# Altium PCB PulseGenerator.PcbDoc
Units mil, origin at the board's own origin, x right, y up, seen from the top; angles counter-clockwise.
Board outline 705 x 850 mil, 2 copper layers (Top Layer, Bottom Layer); 6 components, 5 nets, 25 pads, 2 vias.
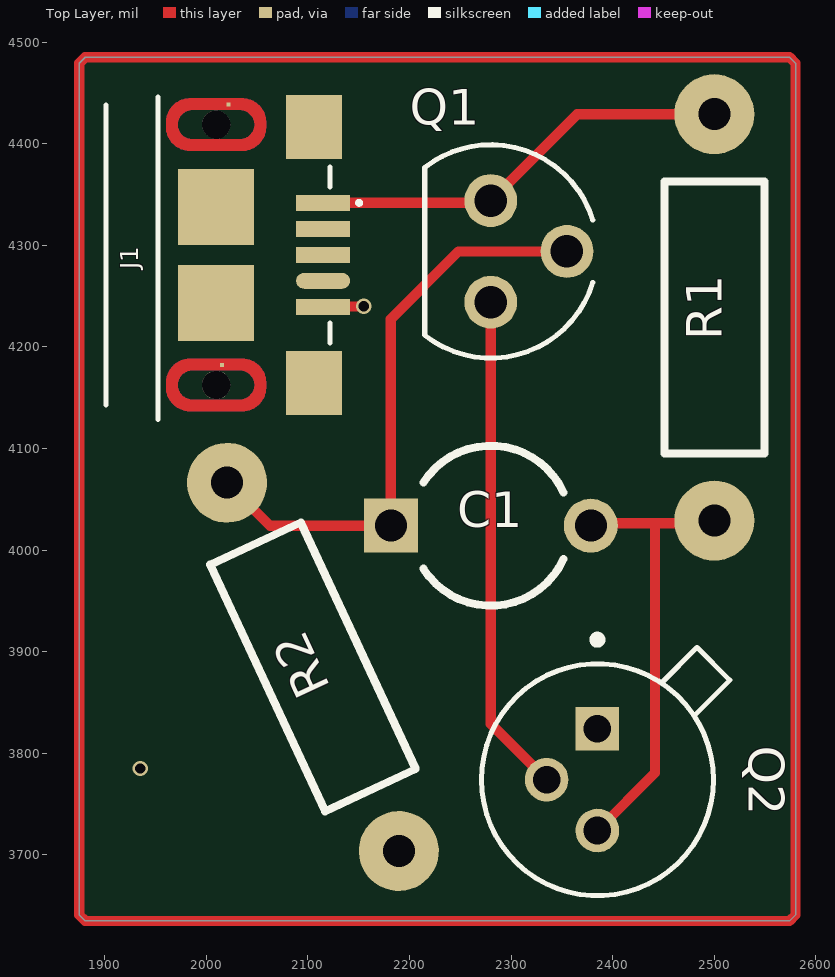
[diagram p0: Top Layer view]
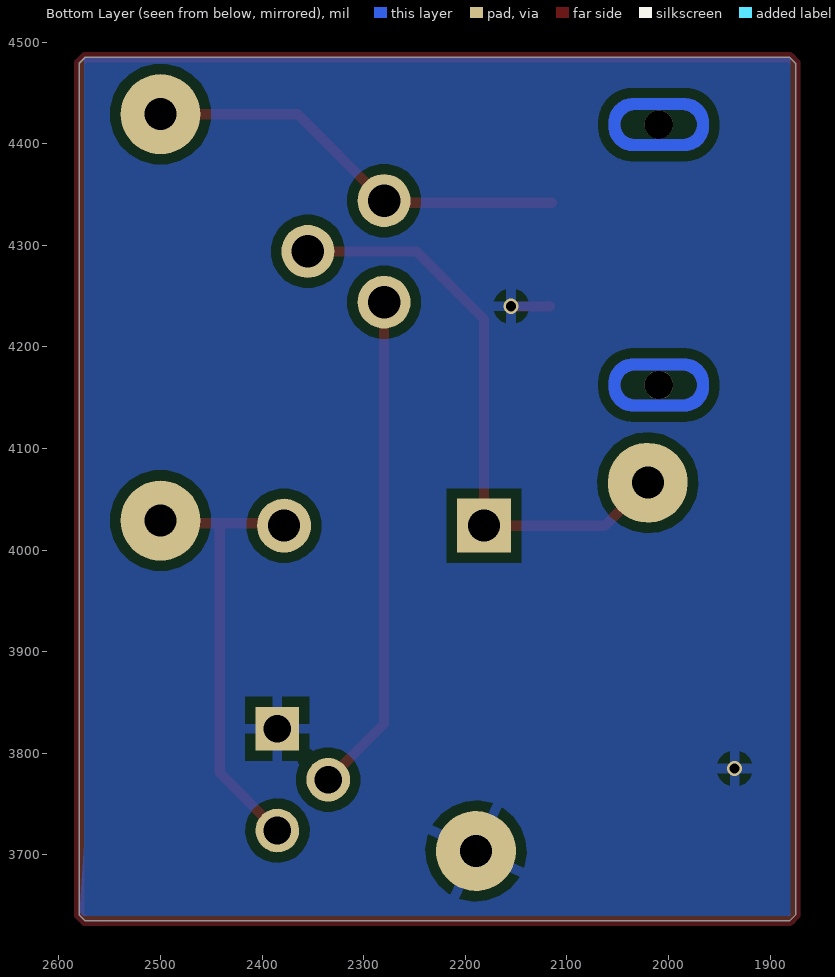
[diagram p1: Bottom Layer view, seen from below]

## Layer stack, top to bottom
Top Solder: solder mask 0.4, Solder Resist, Dk 3.5
Top Layer: signal copper 1.4
Dielectric 1: dielectric 12.6, FR-4, Dk 4.8
Bottom Layer: signal copper 1.4
Bottom Solder: solder mask 0.4, Solder Resist, Dk 3.5

## Board outline
1880.86,3635 1875,3640.86 1875,4479.14 1880.86,4485 2574.14,4485 2580,4479.14 2580,3640.86 2574.14,3635

## Design rules (kind name [scope] priority, off if disabled: settings)
Clearance [All] p1: gap=10 ignorepadtopadclearanceinfootprint=FALSE except(0: Arc-Hole Track-Hole SMDPad-Hole THPad-Hole Via-Hole Fill-Hole Poly-Hole Region-Hole Text-Hole)
PolygonConnect [All] p1: connectstyle=Relief reliefconductorwidth=10 reliefentries=4 polygonreliefangle="90 Angle" airgapwidth=10
RoutingVias [All] p1: holewidth=28 width=50 viastyle="Through Hole" minholewidth=28 minwidth=50 maxholewidth=28 maxwidth=50
SilkToSolderMaskClearance [IsText] p1: minsilkscreentomaskgap=10 clearancetoexposedcopper=TRUE
SolderMaskExpansion [All] p1: expansion=4 istentingtop=FALSE
Width [All] p1: maxlimit=10 minlimit=10 preferedwidth=10
29 further rules are at their usual default settings.

## Components (designator, comment, footprint, x,y, rotation, side; value= is the part's Value field where it differs from the comment)
C1 "Cap2" CAPR5-4X5 2280,4023.94 r0 top value=1uF
J1 "2013499-1" TE_2013499-1 2115,4290.59 r270 top
Q1 "2N3906" TO92 2280,4293.94 r270 top
Q2 "2N2222" TO127P580H530-3 2385,3773.94 r270 top
R1 "22" RES1016-6800X250_PHO 2500,4228.94 r90 top
R2 "100K" RES1016-6800X250_PHO 2105,3885 r115 top

## Footprints (in the part's own frame and the unit in brackets; to place one, negate y for a bottom-side part, rotate by r counter-clockwise, add the part's x,y. Pads: shape width x height; smd on the part's side, far side on the other; paste and mask are expansions set on the pad)
CAPR5-4X5 [mm] "Capacitor; 2 Leads"
  rect 1.35x1.35 hole 0.8: 1(-2.5,0)
  round 1.35 hole 0.8: 2(2.5,0)
  silkscreen extent -1.69,-2 1.82,2
RES1016-6800X250_PHO [mm] "Axial Resistor MCF 6.8D2.5mm"
  round 2 hole 0.8: 1(-5.08,0) 2(5.08,0)
  silkscreen extent -3.4,-1.25 3.4,1.25, body extent -3.45,-1.3 3.45,1.3, height 2.5
TE_2013499-1 [mm]
  rect 0.4x1.35 smd: 1(-1.3,0) 2(-0.65,0) 3(0,0) 5(1.3,0)
  oval 0.4x1.35 smd: 4(0.65,0)
  rect 1.6x1.4 smd: 6(3.2,-0.225) 7(-3.2,-0.225)
  rect 1.9x1.9 smd: 8(-1.2,-2.675) 9(1.2,-2.675)
  rect 0.1x0.1 smd paste-1 mask+0: 10(-3.76,-2.37) 11(2.75,-2.53)
  round 0.71 hole 0.71 unplated: ""(-3.255,-2.675) ""(3.255,-2.675)
  Top Layer region: 126 vertices and 1 holes, not listed, extent -3.91,-3.928 -2.6,-1.425
  Top Layer region: 126 vertices and 1 holes, not listed, extent 2.6,-3.928 3.91,-1.425
  Bottom Layer region: 126 vertices and 1 holes, not listed, extent -3.91,-3.928 -2.6,-1.425
  Bottom Layer region: 126 vertices and 1 holes, not listed, extent 2.6,-3.928 3.91,-1.425
  silkscreen extent -3.94,-5.43 4.12,0.95
TO92 [mil]
  round 52 hole 32: 1(50,0) 2(0,75) 3(-50,0)
  silkscreen extent -105,-65 105,100
TO127P580H530-3 [mm]
  rect 1.09x1.09 hole 0.69: 1(-1.27,0)
  round 1.09 hole 0.69: 2(0,-1.27) 3(1.27,0)
  silkscreen extent -3.6,-2.9 2.9,3.31

## Part data
C1: "Capacitor", PackageDescription="Capacitor; 2 Leads", PackageReference=CAPR5-4X5, Published=23-Sep-2002, Publisher="Altium Limited"
J1: "Conn Micro USB 2.0 Type B RCP 5 POS 0.65mm Solder RA SMD 5 Terminal 1 Port T/R", Package=None, Availability=Unavailable, Centerline_Pitch=".65 mm[.025 in]", MF="TE Connectivity", MP=2013499-1, Number_of_Positions=5, Price=None, Product_Type=Connector, SnapEDA_Link=https://www.snapeda.com/parts/2013499-1/TE%20Connectivity%20AMP%20Connectors/view-part/779144/?ref=snap, TE_purchase_URL=https://www.te.com/usa-en/product-2013499-1.html?te_bu=Cor&te_type=disp&te_campaign=seda_glo_cor-seda-global-disp-prtnr-fy19-seda-model-bom-cta_sma-317_1&elqCampaignId=32493
Q1: "Bipolar _BJT_ Transistor PNP 40V 200mA 250MHz 625mW Through Hole TO-92", Package="TO-226-3 Diotec Semiconductor", Availability=Unavailable, MF="Diotec Semiconductor", MP=2N3906, Price=None, SnapEDA_Link=https://www.snapeda.com/parts/2N3906/Diotec/view-part/4593480/?ref=snap
Q2: "Bipolar _BJT_ Transistor NPN 50V 800mA 500mW Through Hole TO-18 _TO-206AA_", Package="TO-18-3 NJS", Digi-Key_Part_Number=1086-15156-ND, Digi-Key_Purchase_URL=https://www.digikey.com.mx/product-detail/en/microsemi-corporation/JANS2N2222A/1086-15156-ND/4384334?utm_source=snapeda&utm_medium=aggregator&utm_campaign=symbol, MF="MICROSS/On Semiconductor", MP=2N2222, SnapEDA_Link=https://www.snapeda.com/parts/2N2222/MICROSS/On%20Semiconductor/view-part/561967/?ref=snap
R1 R2: library part 0ohm_MCF0.25W0R_MUL, "RESISTOR, ZERO OHM LINK   Resistance:0R; Power rating:0.25W; Resistor element type:Carbon Film; Voltage, rating:250V dc; Case style:Axial; Diameter, body:2.5mm; Length / Height, external:6.8mm; Voltage rating, DC:250V", Manufacturer_A=MULTICOMP, Package_A=6.8x2.5mm, PartNumber_A=MCF0.25W0R, Value_A=0ohm, ComponentLink1Description=Datasheet, ComponentLink1URL=DATASHEETS\MCF.pdf

## Via types
v1: diameter 15, hole 10, Top Layer to Bottom Layer, 2 vias

## Nets (pads, with @x,y where several pads share a name; then routed paths per layer and width w, separated by ;. In a path a pad name is that pad's centre, name@x,y a point inside that pad or via, vN(x,y) a via of type N, cw(c..) or ccw(c..) an arc to the next point about the centre after c; other vN are vias at no path point)
+5: J1.1 Q1.3 R1.2 | length 421.1
  Top Layer w10: J1.1 2277.83,4341.77 Q1.3 2365,4428.94 R1.2
GND: J1.5 Q2.1 R2.1 | length 38.4
  Top Layer w10: J1.5@2116.89,4240 2117.19,4239.7 2154.7,4239.7 v1(2155,4240)
  other v1: 1935,3785
NetC1_1: C1.1 Q1.2 R2.2 | length 592.3
  Top Layer w10: R2.2 2062.8,4023.94 C1.1 2181.57,4227.23 2248.28,4293.94 Q1.2 2353.83,4295.1 Q1.2@2346.17,4295.1
NetC1_2: C1.2 Q2.3 R1.1 | length 450.7
  Top Layer w10: C1.2 2380.93,4026.44 2439.21,4026.44 ; Q2.3 2441.71,3780.65 2441.71,4023.94 2439.21,4026.44 ; R1.1 2497.5,4026.44 2439.21,4026.44
NetQ1_1: Q1.1 Q2.2 | length 492.8
  Top Layer w10: Q1.1 2280,3828.94 Q2.2
pads on no net: J1. J1.2 J1.3 J1.4 J1.6 J1.7 J1.8 J1.9 J1.10 J1.11
copper on no net: | length 3096.3
  Top Layer w10: 1875,3640.86 1875,4479.14 1880.86,4485 2574.14,4485 2580,4479.14 2580,3640.86 2574.14,3635 1880.86,3635 1875,3640.86

## Polygon pours and split planes (outlines as drawn)
GND on Bottom Layer "GND_L02_P001" (solid, pour order 1): 1880,4485 2575,4485 2575,3710 2579.55,3640 2385,3640 1880,3640

## Text inside footprints (layer, text, board x,y; h text height)
Q1: Mechanical 13 "2" at 2305.02,4318.96 h50.04 r270; Mechanical 13 "3" at 2280,4378.96 h50.02 r270; Mechanical 13 "1" at 2280,4248.85 h50.09 r270